# Altium PCB NRF.PcbDoc
Units mil, origin at the board's own origin, x right, y up, seen from the top; angles counter-clockwise.
Board outline 770.03 x 1375.03 mil, 2 copper layers (Top Layer, Bottom Layer); 3 components, 8 nets, 34 pads, 2 vias.
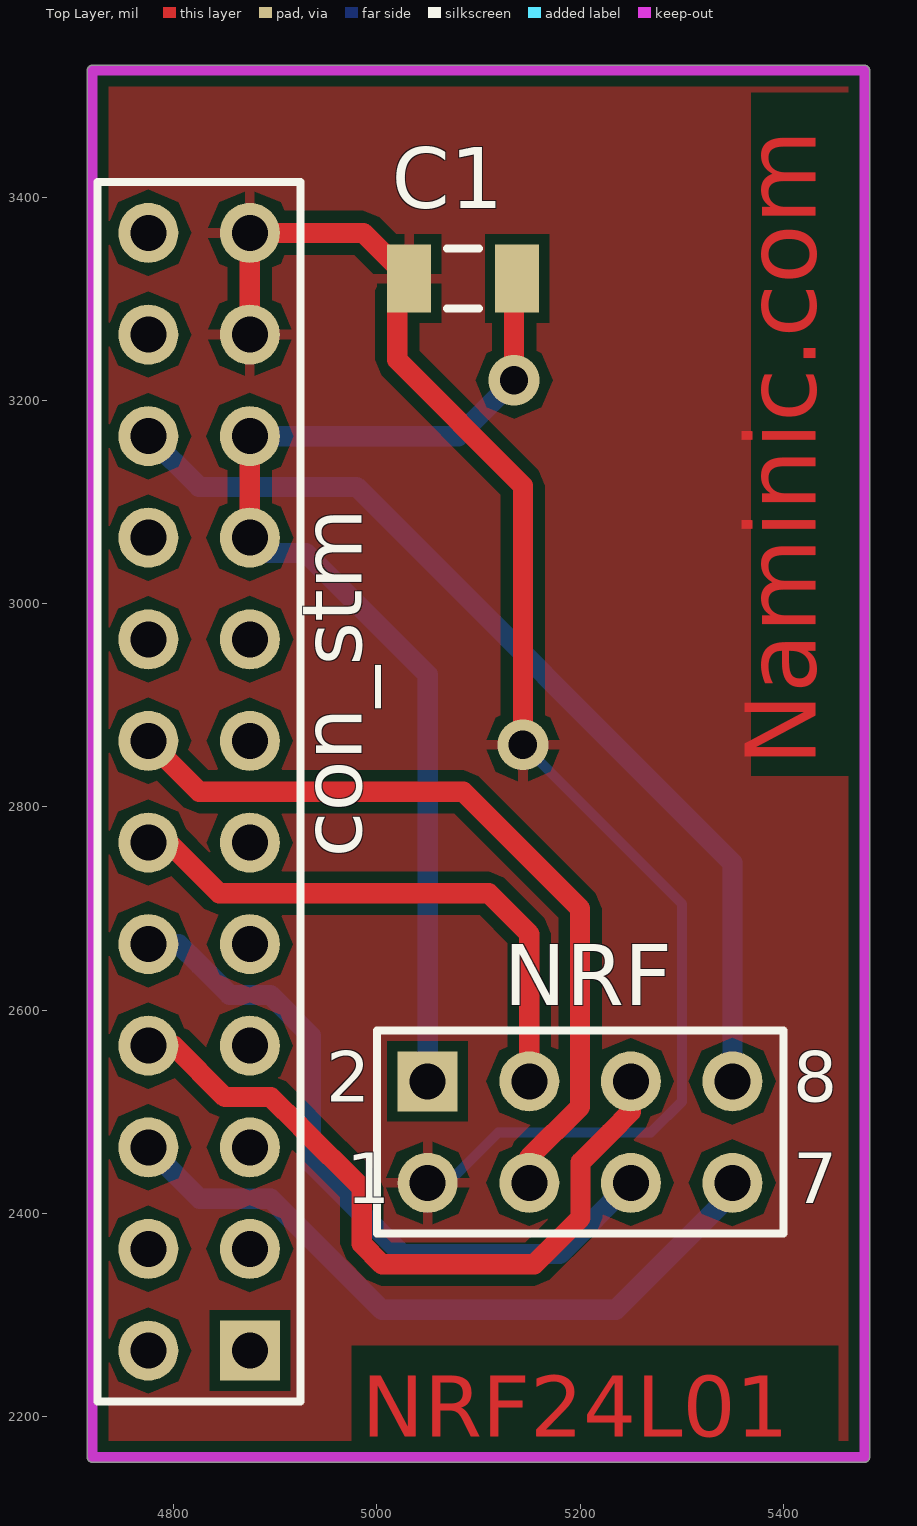
[diagram p0: Top Layer view]
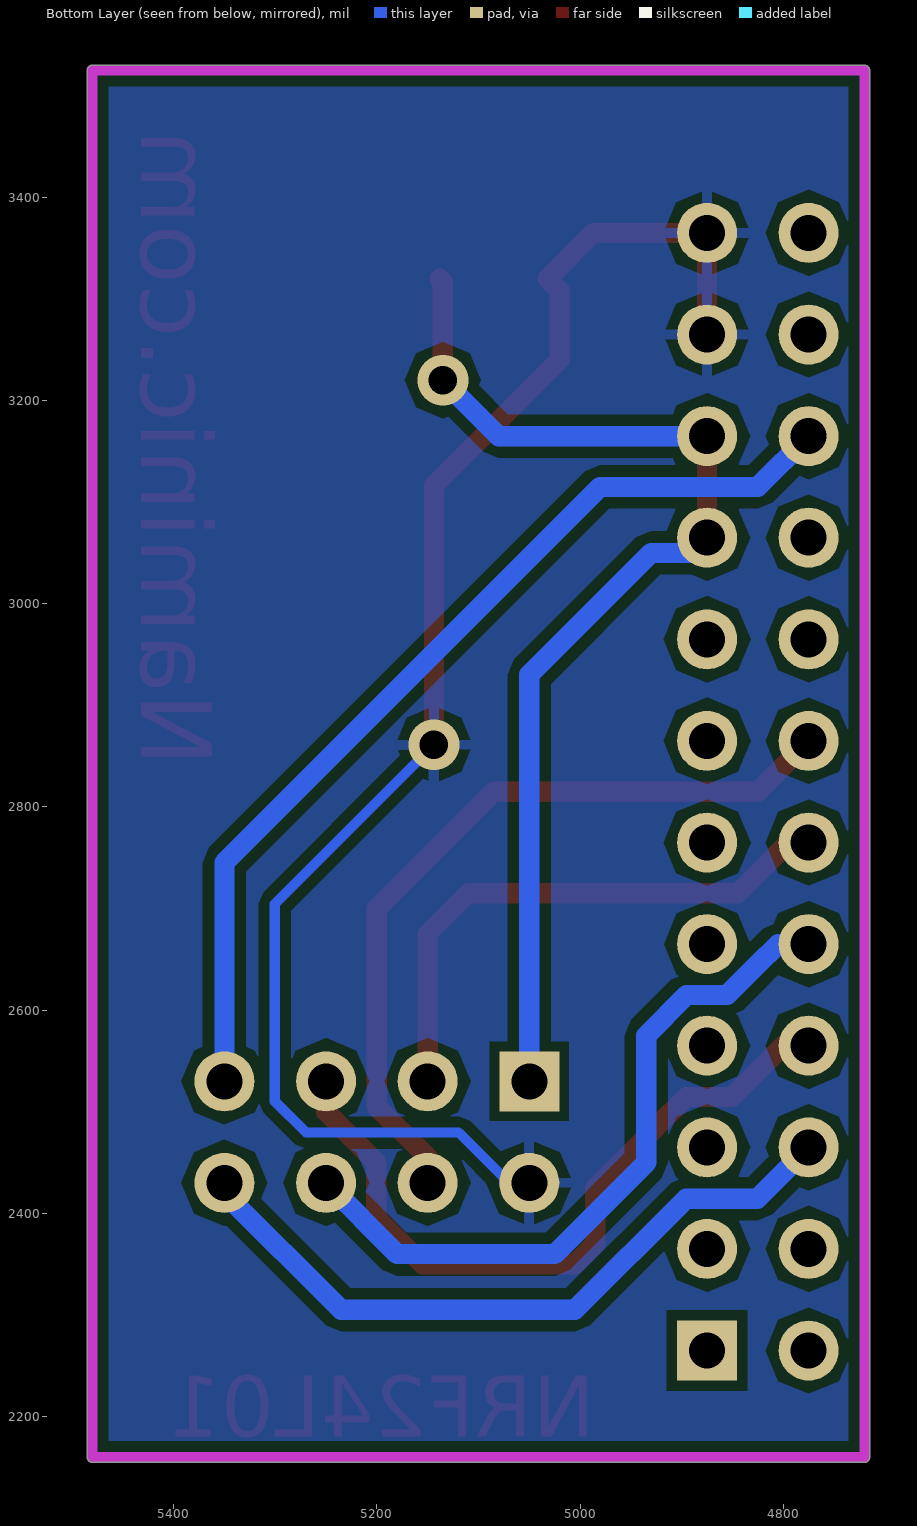
[diagram p1: Bottom Layer view, seen from below]

## Layer stack, top to bottom
Top Solder: solder mask 0.4, Solder Resist, Dk 3.5
Top Layer: signal copper 1.4
Dielectric 1: dielectric 12.6, FR-4, Dk 4.8
Bottom Layer: signal copper 1.4
Bottom Solder: solder mask 0.4, Solder Resist, Dk 3.5

## Board outline
4714.98,2160 ccw(c4720,2160) 4720,2154.99 5480,2154.99 ccw(c5480,2160) 5485.02,2160 5485.02,3525 ccw(c5480,3525) 5480,3530.01 4720,3530.01 ccw(c4720,3525) 4714.98,3525

## Design rules (kind name [scope] priority, off if disabled: settings)
Clearance [All] p1: gap=10
PolygonConnect [All] p1: connectstyle=Relief reliefconductorwidth=10 reliefentries=4 polygonreliefangle="90 Angle" airgapwidth=10
RoutingVias [All] p1: holewidth=28 width=50 viastyle="Through Hole" minholewidth=28 minwidth=50 maxholewidth=28 maxwidth=50
SolderMaskExpansion [All] p1: expansion=4
Width [All] p1: maxlimit=20 minlimit=10 preferedwidth=20 minimp=50.000000 maximp=50.000000 favimp=50.000000
30 further rules are at their usual default settings.

## Components (designator, comment, footprint, x,y, rotation, side; value= is the part's Value field where it differs from the comment)
C1 "" C1206 5085,3320 r0 top
con_stm "Header 12X2" HDR2X12 4875,2265 r90 top (schematic designator connctor_stm)
NRF "Header 4X2" HDR2X4 5050,2430 r0 top

## Footprints (in the part's own frame and the unit in brackets; to place one, negate y for a bottom-side part, rotate by r counter-clockwise, add the part's x,y. Pads: shape width x height; smd on the part's side, far side on the other; paste and mask are expansions set on the pad)
C1206 [mm] "Chip Capacitor, Body 3.2x1.6mm, IPC High Density"
  rect 1.1x1.7 smd: 1(-1.35,0) 2(1.35,0)
  silkscreen extent -0.4,-0.75 0.4,0.75, body extent -1.7,-0.9 1.7,0.9, height 1.3
HDR2X4 [mm] "Connector; Header; 4x2 Position"
  round 1.5 hole 0.9: 1(0,0) 3(2.54,0) 4(2.54,2.54) 5(5.08,0) 6(5.08,2.54) 7(7.62,0) 8(7.62,2.54)
  rect 1.5x1.5 hole 0.9: 2(0,2.54)
  silkscreen extent -1.27,-1.27 8.89,3.81
HDR2X12 [mm] "Connector; Header; 12x2 Position"
  rect 1.5x1.5 hole 0.9: 1(0,0)
  round 1.5 hole 0.9: 2(0,2.54) 3(2.54,0) 4(2.54,2.54) 5(5.08,0) 6(5.08,2.54) 7(7.62,0) 8(7.62,2.54) 9(10.16,0) 10(10.16,2.54) 11(12.7,0) 12(12.7,2.54) 13(15.24,0) 14(15.24,2.54) 15(17.78,0) 16(17.78,2.54) 17(20.32,0) 18(20.32,2.54) 19(22.86,0) 20(22.86,2.54) 21(25.4,0) 22(25.4,2.54) 23(27.94,0) 24(27.94,2.54)
  silkscreen extent -1.27,-1.27 29.21,3.81

## Part data
C1: library part "Cap Semi", "Capacitor (Semiconductor SIM Model)"
con_stm: "Header, 12-Pin, Dual row"
NRF: "Header, 4-Pin, Dual row"

## Via types
v1: diameter 50, hole 28, Top Layer to Bottom Layer, 2 vias

## Nets (pads, with @x,y where several pads share a name; then routed paths per layer and width w, separated by ;. In a path a pad name is that pad's centre, name@x,y a point inside that pad or via, vN(x,y) a via of type N, cw(c..) or ccw(c..) an arc to the next point about the centre after c; other vN are vias at no path point)
GND: C1.1 con_stm.21 con_stm.23 NRF.1 | length 1489.9
  Top Layer w20: con_stm.21 con_stm.23 4986.85,3365 C1.1 5020,3308.15 5020,3240 5143.79,3116.21 v1(5143.79,2861.21)
  Bottom Layer w10: NRF.1@5070,2430 5119.53,2479.53 5269.57,2479.53 5300.47,2510.43 5300.47,2704.53 v1(5143.79,2861.21)
  Bottom Layer w20: NRF.1 NRF.1@5070,2430
IRQ: con_stm.20 NRF.8 | length 964
  Bottom Layer w20: con_stm.20 4825,3115 4980,3115 5350,2745 NRF.8
SPI_CE: con_stm.14 NRF.3 | length 784.1
  Top Layer w20: con_stm.14 4825,2815 5085,2815 5200,2700 5200,2505 5150,2455 NRF.3
SPI_CS: con_stm.12 NRF.4 | length 557.3
  Top Layer w20: con_stm.12 4795,2765 4845,2715 5110,2715 5150,2675 NRF.4
SPI_MISO: con_stm.6 NRF.7 | length 698.9
  Bottom Layer w20: con_stm.6 4825.47,2414.53 4895.52,2414.53 5005.04,2305 5235,2305 5350,2420 NRF.7
SPI_MOSI: con_stm.8 NRF.6 | length 720.7
  Top Layer w20: con_stm.8 4800,2565 4850.47,2514.53 4895.52,2514.53 4924.53,2485.51 ; 4924.53,2485.47 4985,2425 4985,2370 5005,2350 5155,2350 5200.47,2395.47 5200.47,2450.51 5229.48,2479.53 ; 5229.53,2479.53 5250,2500 NRF.6
SPI_SCK: con_stm.10 NRF.5 | length 703.6
  Bottom Layer w20: con_stm.10 4805,2665 4825.47,2644.53 ; 4825.47,2644.49 4854.48,2615.47 ; 4854.53,2615.47 4855,2615 4895.04,2615 4935,2575.04 4935,2450 5025,2360 5180,2360 NRF.5
VCC: C1.2 con_stm.17 con_stm.19 NRF.2 | length 1115
  Top Layer w20: con_stm.17 con_stm.19 ; v1(5135,3220) 5135,3316.85 C1.2
  Bottom Layer w20: con_stm.17 4890,3050 4930,3050 5050,2930 NRF.2 ; con_stm.19 5080,3165 v1(5135,3220)
pads on no net: con_stm.1 con_stm.2 con_stm.3 con_stm.4 con_stm.5 con_stm.7 con_stm.9 con_stm.11 con_stm.13 con_stm.15 con_stm.16 con_stm.18 con_stm.22 con_stm.24

## Polygon pours and split planes (outlines as drawn)
GND on Top Layer "Top Layer-No Net" (solid, pour order 0): 4720,3525 5475,3525 5475,2160 4720,2160 4720,3525
GND on Bottom Layer "Top Layer-No Net" (solid, pour order 2): 4720,3525 5480,3525 5480,2160 4720,2160 4720,3525

## Keep-outs
Keep-Out Layer:
  lines w10: 4720,2160 5480,2160 5480,2445 5480,3525 4720,3525 4720,2160

## Other copper
Top Layer:
  text "Naminic.com" at 5455,2840 h120 r90
  text "NRF24L01" at 4985,2180 h60

## Text inside footprints (layer, text, board x,y; h text height)
NRF: Top Overlay "2" at 4950,2510 h50; Top Overlay "1" at 4970,2410 h50; Top Overlay "7" at 5410,2410 h50; Top Overlay "8" at 5410,2510 h50